# EAGLE board uC_ATMEL (EAGLE 7.1.0)
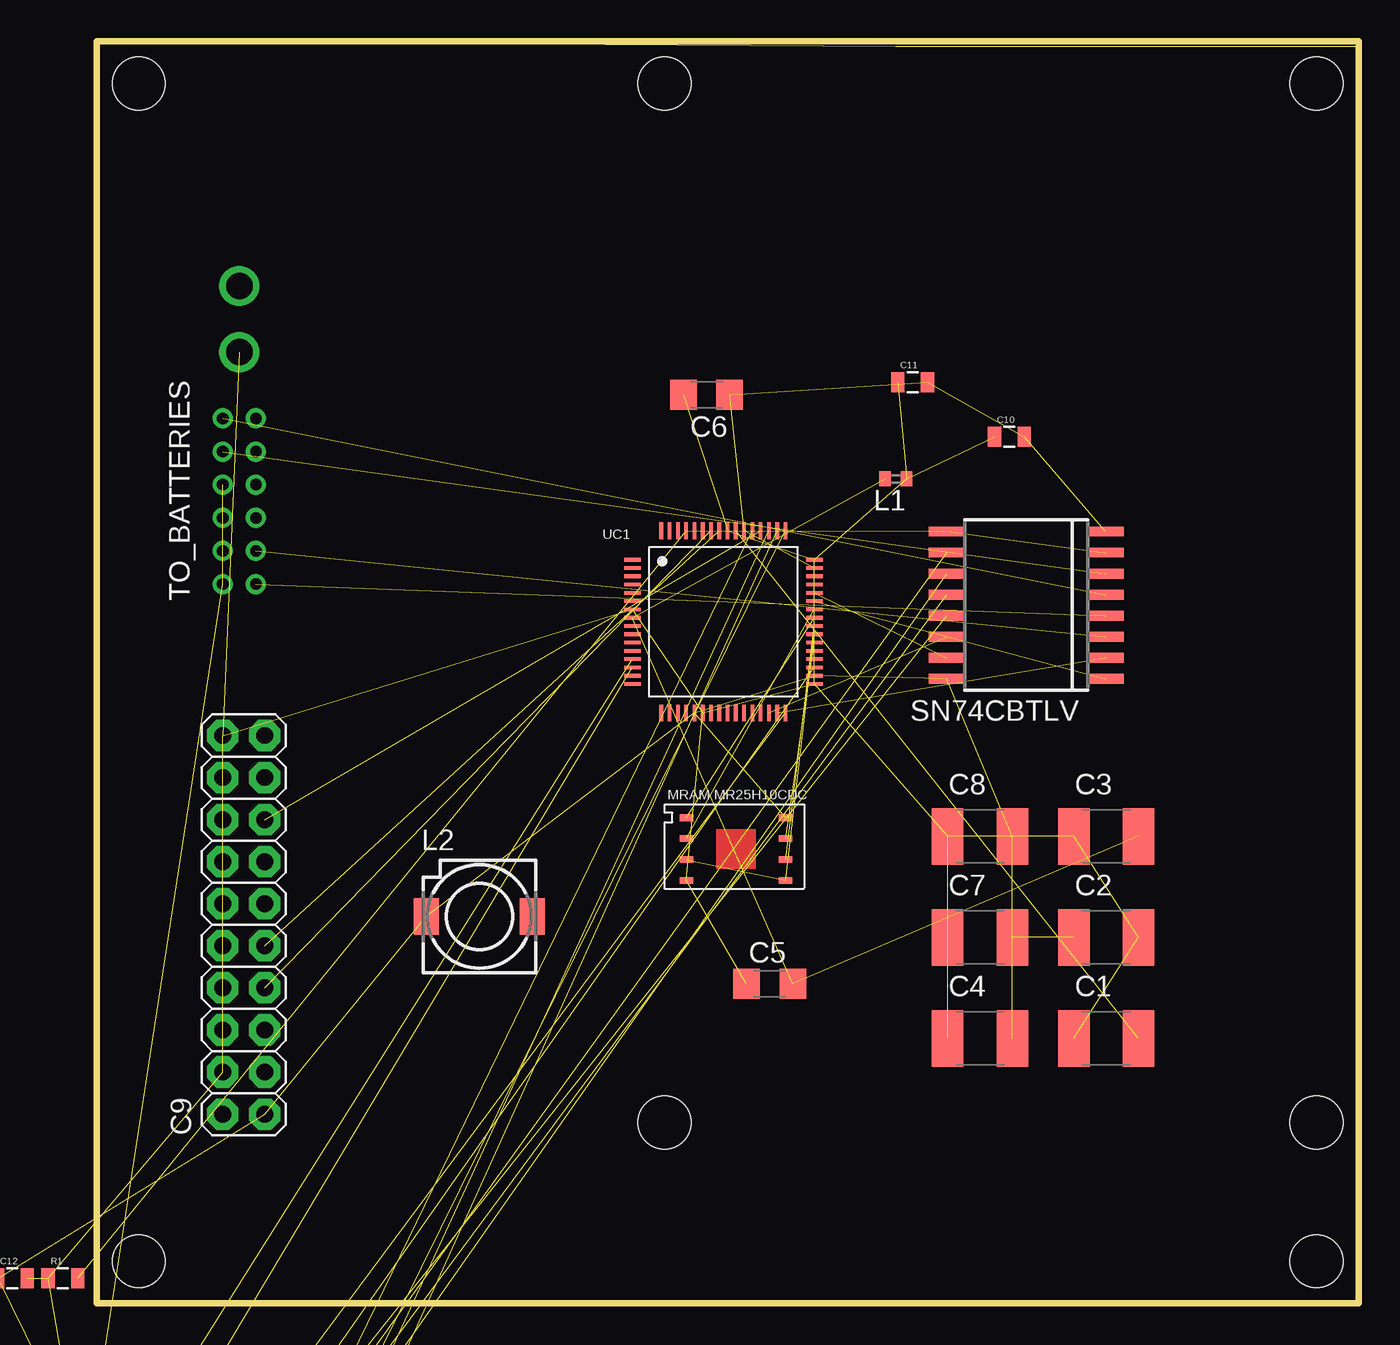
[diagram p0: board, top side]
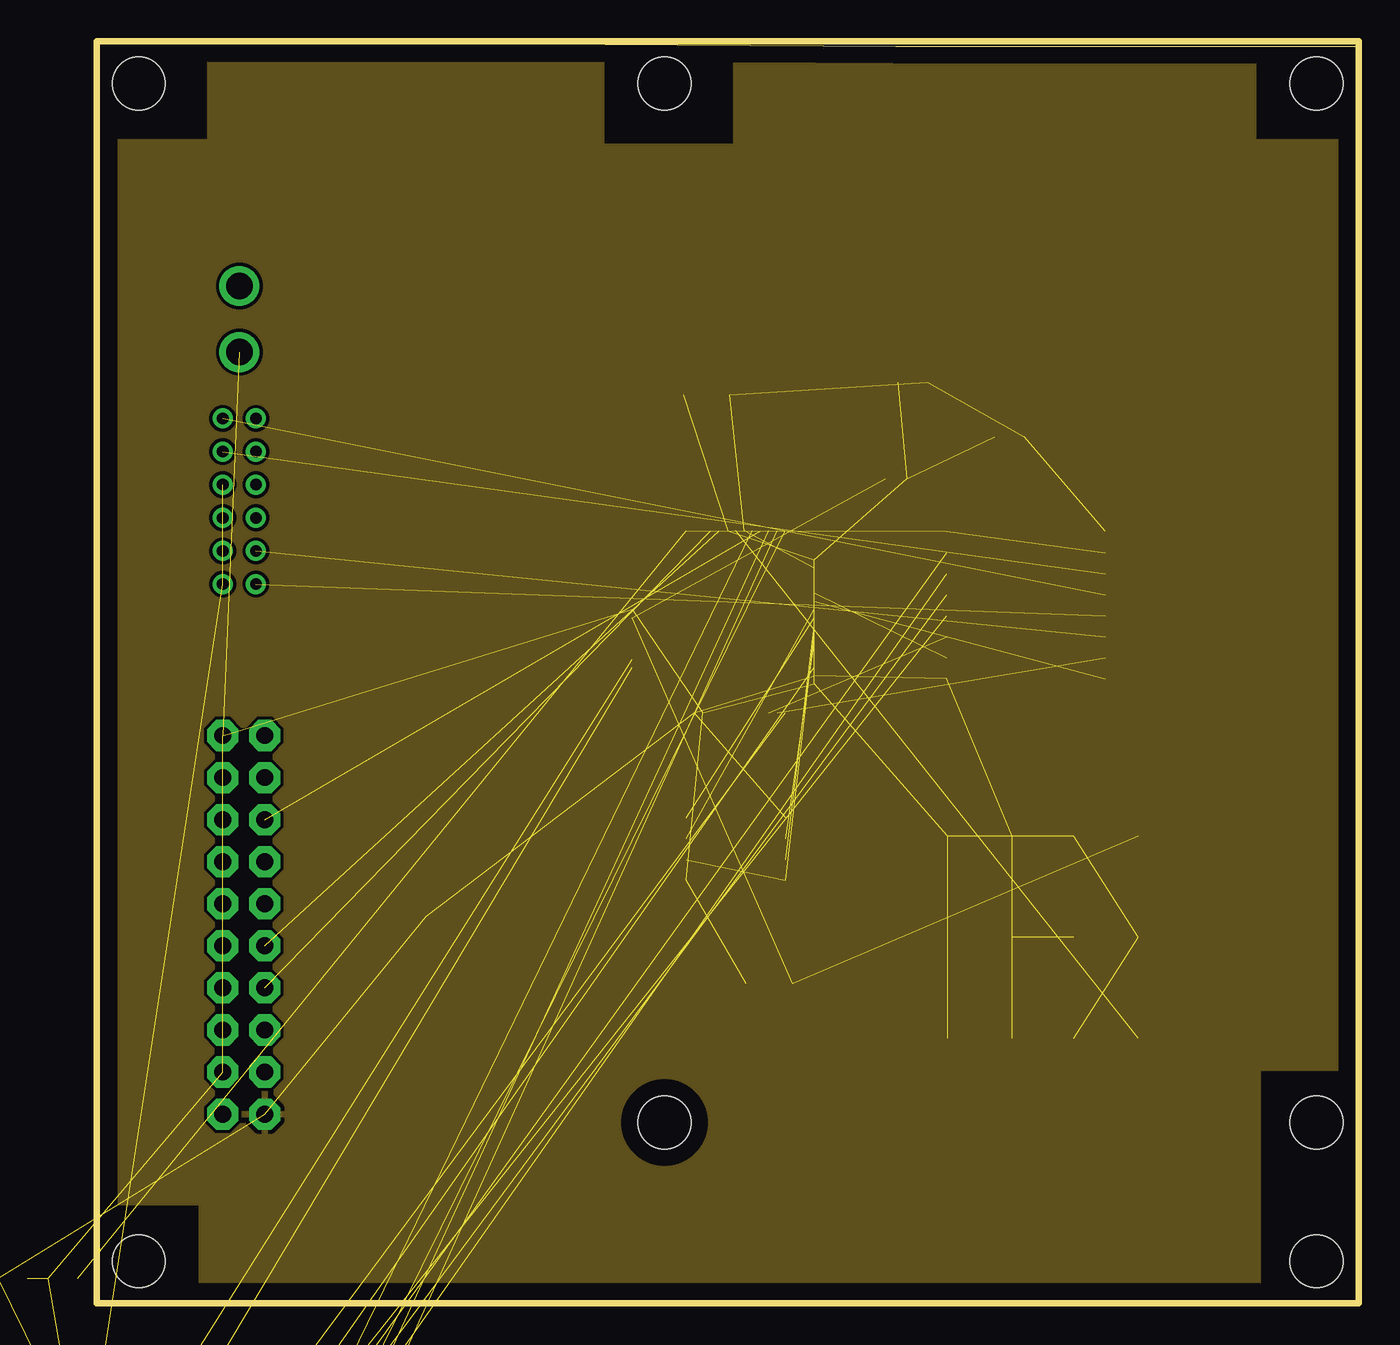
[diagram p1: board, inner layer VDD]
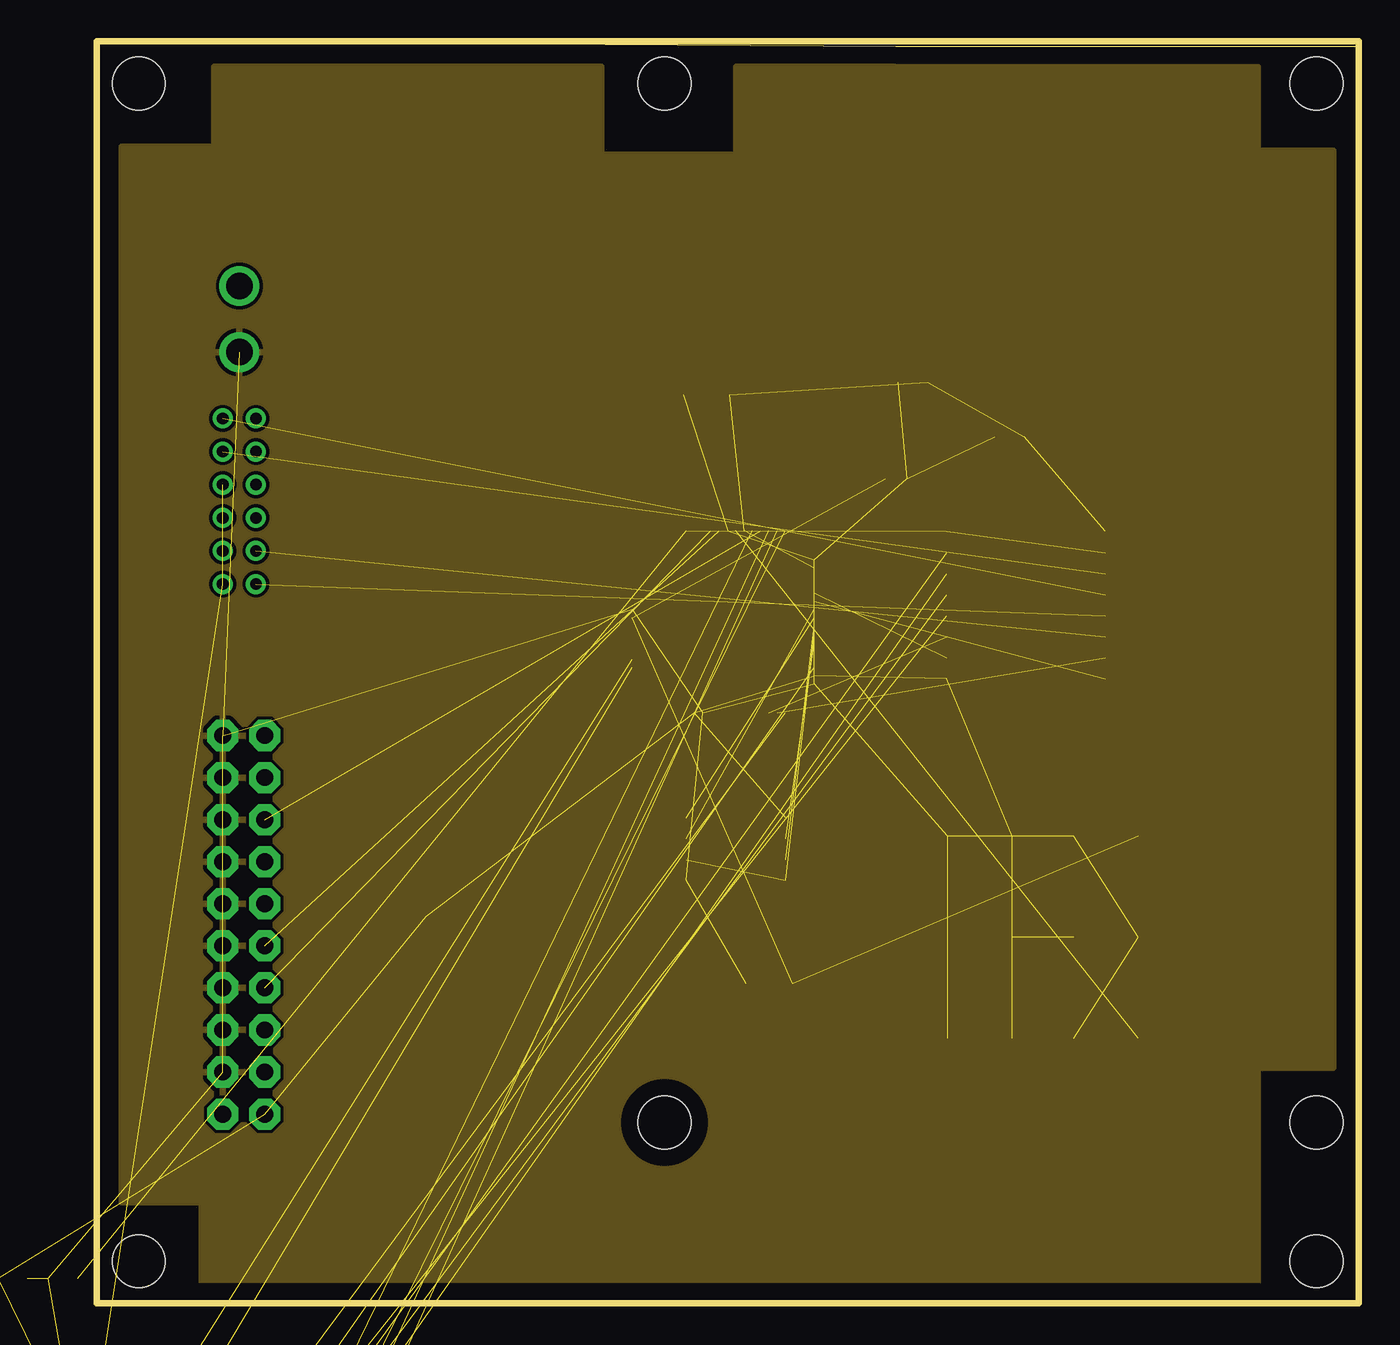
[diagram p2: board, inner layer GND]

Size 76.2 x 76.2 mm. Coordinates in mm from the lower left corner, seen from the top.
Outline: 76.18,75.87 48.26,75.87 0,76.2
Outline: 0,76.2 0,0 76.18,0 76.2,0 76.2,76.2 0,76.2
Copper layers (1*2*3*16): Top 0.035mm / dielectric 1.5mm / VDD 0.035mm / dielectric 0.15mm / GND 0.035mm / dielectric 0.2mm / Bottom 0.035mm
Design rules "default *": minimum track width 10mil, minimum drill 24mil, track to track 8mil, track to pad 8mil, pad to pad 8mil, via to via 8mil, smd to smd 8mil, copper to edge 40mil, drill to drill 8mil, minimum pad ring 10mil, minimum via ring 8mil, stop-mask expansion 4mil, vias tented up to drill 0mil, thermal gap 10mil
Holes 3.17 mm at 2.54,2.54 73.66,2.54 73.66,10.92 73.66,73.66 2.54,73.66 34.29,10.92 34.29,73.66
tKeepout: area -0.3,-0.3 to 5.1,5.1; area 0,71.1 to 5.1,76.2; area 31.8,71.1 to 36.8,76.2; area 71.1,71.1 to 76.2,76.2; area 31.8,8.4 to 36.8,13.5; area 71.1,0 to 76.2,13.5

## Footprints (pad centres in the part's own frame; a part is rotated, then mirrored left to right if it is on the bottom)
C1812 = smd 1.9 x 3.4: 1 -1.95,0; 2 1.95,0
C1206 = smd 1.6 x 1.8: 1 -1.4,0; 2 1.4,0
2X10 = drill 1.016 pad 1.88 octagon: 1 -11.43,-1.27; 2 -11.43,1.27; 3 -8.89,-1.27; 4 -8.89,1.27; 5 -6.35,-1.27; 6 -6.35,1.27; 7 -3.81,-1.27; 8 -3.81,1.27; 9 -1.27,-1.27; 10 -1.27,1.27; 11 1.27,-1.27; 12 1.27,1.27; 13 3.81,-1.27; 14 3.81,1.27; 15 6.35,-1.27; 16 6.35,1.27; 17 8.89,-1.27; 18 8.89,1.27; 19 11.43,-1.27; 20 11.43,1.27
0805 = smd 0.8 x 1.2: 1 -0.9,0; 2 0.9,0
HARWIN_DATAMATE_6 = drill 0.7 square: P$1 -2,1; P$2 0,1; P$3 2,1; P$4 2,-1; P$5 0,-1; P$6 -2,-1 | hole 2.2: -5.5,0; 5.5,0
0402 = smd 0.7 x 0.9: 1 -0.65,0; 2 0.65,0
SLF7045 = smd 1.5 x 2.2: 1 -3.2,0; 2 3.2,0
SOIC16R = smd 0.6 x 2.2: 1 -4.445,-4.775; 2 -3.175,-4.775; 3 -1.905,-4.775; 4 -0.635,-4.775; 5 0.635,-4.775; 6 1.905,-4.775; 7 3.175,-4.775; 8 4.445,-4.775; 9 4.445,4.8; 10 3.175,4.8; 11 1.905,4.8; 12 0.635,4.8; 13 -0.635,4.8; 14 -1.905,4.8; 15 -3.175,4.8; 16 -4.445,4.8
HARWIN_DATAMATE_14 = drill 0.7: P$1 0,0; P$2 2,0; P$3 4,0; P$4 6,0; P$5 8,0; P$6 10,0; P$7 0,-2; P$8 2,-2; P$9 4,-2; P$10 6,-2; P$11 8,-2; P$12 10,-2 | drill 1.6: P$13 14,-1; P$14 18,-1
HARWIN_DATAMATE_12 = drill 0.7 square: P$1 -5,1; P$2 -3,1; P$3 -1,1; P$4 1,1; P$5 3,1; P$6 5,1; P$7 5,-1; P$8 3,-1; P$9 1,-1; P$10 -1,-1; P$11 -3,-1; P$12 -5,-1 | hole 2.8: -8.5,0; 8.5,0
8PXMO-229 = smd 0.813 x 0.406: P1 -3,1.895; P2 -3,0.635; P3 -3,-0.635; P4 -3,-1.895; P5 3,-1.895; P6 3,-0.635; P7 3,0.635; P8 3,1.895
QFN10_POWERPAD = smd 0.203 x 0.406: P$1 0.14,0.241; P$2 0.641,0.241; P$3 1.141,0.242; P$4 1.639,0.239; P$5 2.139,0.242; P$6 2.14,3.559; P$7 1.639,3.559; P$8 1.139,3.555; P$9 0.641,3.555; P$10 0.139,3.558 | smd 1.778 x 0.914: PAD 1.155,1.898
TQFP-64 = smd 1 x 0.22: P$1 -5.5,3.5; P$2 -5.5,3; P$3 -5.5,2.5; P$4 -5.5,2; P$5 -5.5,1.5; P$6 -5.5,1; P$7 -5.5,0.5; P$8 -5.5,0; P$9 -5.5,-0.5; P$10 -5.5,-1; P$11 -5.5,-1.5; P$12 -5.5,-2; P$13 -5.5,-2.5; P$14 -5.5,-3; P$15 -5.5,-3.5; P$16 -5.5,-4; P$33 5.5,-4; P$34 5.5,-3.5; P$35 5.5,-3; P$36 5.5,-2.5; P$37 5.5,-2; P$38 5.5,-1.5; P$39 5.5,-1; P$40 5.5,-0.5; P$41 5.5,0; P$42 5.5,0.5; P$43 5.5,1; P$44 5.5,1.5; P$45 5.5,2; P$46 5.5,2.5; P$47 5.5,3; P$48 5.5,3.5 | smd 0.22 x 1: P$17 -3.75,-5.75; P$18 -3.25,-5.75; P$19 -2.75,-5.75; P$20 -2.25,-5.75; P$21 -1.75,-5.75; P$22 -1.25,-5.75; P$23 -0.75,-5.75; P$24 -0.25,-5.75; P$25 0.25,-5.75; P$26 0.75,-5.75; P$27 1.25,-5.75; P$28 1.75,-5.75; P$29 2.25,-5.75; P$30 2.75,-5.75; P$31 3.25,-5.75; P$32 3.75,-5.75; P$49 3.75,5.25; P$50 3.25,5.25; P$51 2.75,5.25; P$52 2.25,5.25; P$53 1.75,5.25; P$54 1.25,5.25; P$55 0.75,5.25; P$56 0.25,5.25; P$57 -0.25,5.25; P$58 -0.75,5.25; P$59 -1.25,5.25; P$60 -1.75,5.25; P$61 -2.25,5.25; P$62 -2.75,5.25; P$63 -3.25,5.25; P$64 -3.75,5.25

## Placement (x,y rotation side)
C1  0.1u  [C1812]  60.96,16 0 top
C2  0.1u  [C1812]  60.96,22.1 0 top
C3  0.1u  [C1812]  60.96,28.19 0 top
C4  0.1u  [C1812]  53.34,16 0 top
C5  10u  [C1206]  40.64,19.3 0 top
C6  10u  [C1206]  36.83,54.86 180 top
C7  0.1u  [C1812]  53.34,22.1 0 top
C8  0.1u  [C1812]  53.34,28.19 0 top
C9  [2X10]  8.89,22.86 90 top
C10  0.1u  [0805]  55.12,52.32 0 top
C11  0.1u  [0805]  49.28,55.63 0 top
C12  0.1u  [0805]  -5.08,1.52 0 top  (outside the outline)
C13  [0805]  -8.38,-48.77 0 top  (outside the outline)
HEADER1  HARWIN_06  [HARWIN_DATAMATE_6]  0,-28.45 0 top  (outside the outline)
HEADER2  HARWIN_06  [HARWIN_DATAMATE_6]  0,-20.32 0 top  (outside the outline)
HEADER3  HARWIN_06  [HARWIN_DATAMATE_6]  0,-24.38 0 top  (outside the outline)
HEADER4  HARWIN_06  [HARWIN_DATAMATE_6]  0,-36.58 0 top  (outside the outline)
HEADER5  HARWIN_06  [HARWIN_DATAMATE_6]  0,-32.51 0 top  (outside the outline)
L1  BLM15HB121SN1  [0402]  48.26,49.78 180 top
L2  SLF7045  [SLF7045]  23.11,23.37 0 top
R1  1.33k  [0805]  -2.03,1.52 0 top
SN74CBTLV  [SOIC16R]  56.13,42.16 90 top
TO_BATTERIES  [HARWIN_DATAMATE_14]  7.62,43.43 90 top
TO_FLASH  HARWIN_12  [HARWIN_DATAMATE_12]  3.3,-16.26 0 top  (outside the outline)
U1  [SOIC16R]  0.76,-44.7 0 top  (outside the outline)
U$1  [8PXMO-229]  38.61,27.43 0 top
U$2  TPS6300X  [QFN10_POWERPAD]  -5.84,-6.35 0 top  (outside the outline)
U$3  TPS6300X  [QFN10_POWERPAD]  -5.84,-13.21 0 top  (outside the outline)
UC1  SAMD21JTQFP-64  [TQFP-64]  37.85,41.4 0 top

## Library data of the parts
C1-C8 = rcl
C9-C13 HEADER1-HEADER5 R1 SN74CBTLV TO_BATTERIES TO_FLASH U1 U$2 U$3 = CNTRL_BOARD
L1 L2 = inductors
U$1 = mram
UC1 = SAMD21J

## Nets
5V0: TO_BATTERIES.P$1 TO_BATTERIES.P$2 TO_BATTERIES.P$3 TO_BATTERIES.P$4 TO_FLASH.P$12
GND: C1.1 C2.2 C3.1 C4.1 C5.1 C6.1 C7.1 C8.1 C9.4 C9.6 C9.8 C9.10 C9.12 C9.14 C9.16 C9.18 C9.20 C10.2 C11.2 C12.2 R1.1 SN74CBTLV.8 TO_BATTERIES.P$13 TO_FLASH.P$11 U1.8 U$1.P4 UC1.P$7 UC1.P$22 UC1.P$33 UC1.P$47 UC1.P$54
N$1: U$2.P$5 U$2.P$6 U$2.P$7 U$2.P$8
N$2: U$3.P$5 U$3.P$6 U$3.P$7 U$3.P$8
N$3: SN74CBTLV.3 TO_BATTERIES.P$8
N$4: SN74CBTLV.4 TO_BATTERIES.P$7
N$5: SN74CBTLV.5 TO_BATTERIES.P$6
N$6: SN74CBTLV.6 TO_BATTERIES.P$5
N$7: U$3.P$2
N$8: U$2.P$2
N$9: U$2.P$4
N$10: U$3.P$4
N$11: U$2.P$1 U$2.P$10
N$12: SN74CBTLV.13 TO_FLASH.P$5
N$13: SN74CBTLV.12 TO_FLASH.P$6
N$14: SN74CBTLV.11 TO_FLASH.P$7
N$15: SN74CBTLV.10 TO_FLASH.P$8
N$16: U$2.P$9 U$2.PAD
N$17: U$2.P$3
N$18: U$3.P$1 U$3.P$10
N$19: U$3.P$9 U$3.PAD
N$20: U$3.P$3
N$21: HEADER1.P$1 U1.6
N$22: HEADER2.P$1 U1.5
N$23: HEADER3.P$1 U1.4
N$24: HEADER4.P$1 U1.3
N$25: HEADER5.P$1 U1.10
N$26: C13.2
N$27: HEADER4.P$4
N$28: HEADER4.P$5
N$29: HEADER3.P$4
N$30: HEADER3.P$5
N$31: HEADER2.P$4
N$32: HEADER2.P$5
N$33: HEADER1.P$4
N$34: HEADER1.P$5
PA00: UC1.P$1
PA01: UC1.P$2
PA02: UC1.P$3
PA03: UC1.P$4
PA04: HEADER1.P$3 HEADER2.P$3 HEADER3.P$3 HEADER4.P$3 TO_FLASH.P$1 UC1.P$13
PA05: HEADER1.P$2 HEADER2.P$2 HEADER3.P$2 HEADER4.P$2 TO_FLASH.P$2 UC1.P$14
PA06: UC1.P$15
PA07: UC1.P$16
PA08: UC1.P$17
PA09: UC1.P$18
PA10: UC1.P$19
PA11: UC1.P$20
PA12: UC1.P$29
PA13: SN74CBTLV.14 UC1.P$30
PA14: SN74CBTLV.2 UC1.P$31
PA15: TO_FLASH.P$10 UC1.P$32
PA16: TO_FLASH.P$9 UC1.P$35
PA17: UC1.P$36
PA18: UC1.P$37
PA19: U$1.P7 UC1.P$38
PA20: U$1.P1 UC1.P$41
PA21: U$1.P2 UC1.P$42
PA22: SN74CBTLV.1 UC1.P$43
PA23: SN74CBTLV.15 UC1.P$44
PA24: UC1.P$45
PA25: UC1.P$46
PA27: U1.1 UC1.P$51
PA28: U1.15 UC1.P$53
PA30: C9.9 UC1.P$57
PA31: C9.7 UC1.P$58
PB00: R1.2 SN74CBTLV.7 SN74CBTLV.9 UC1.P$61
PB01: UC1.P$62
PB02: UC1.P$63
PB03: UC1.P$64
PB04: UC1.P$5
PB05: UC1.P$6
PB06: UC1.P$9
PB07: UC1.P$10
PB08: UC1.P$11
PB09: UC1.P$12
PB10: UC1.P$23
PB11: UC1.P$24
PB12: UC1.P$25
PB13: UC1.P$26
PB14: UC1.P$27
PB15: UC1.P$28
PB16: U$1.P3 U$1.P5 UC1.P$39
PB17: U$1.P6 UC1.P$40
PB22: U1.14 UC1.P$49
PB23: U1.2 UC1.P$50
PB30: UC1.P$59
PB31: UC1.P$60
PHOTODIODE_FLASH: TO_FLASH.P$4
PRIMARY: TO_BATTERIES.P$14
PWROUT_S1: HEADER1.P$6
PWROUT_S2: HEADER2.P$6
PWROUT_S3: HEADER3.P$6
PWROUT_S4: HEADER4.P$6
RESETN: C9.15 UC1.P$52
V_SECONDARY_1: TO_BATTERIES.P$9
V_SECONDARY_2: TO_BATTERIES.P$10
V_SECONDARY_3: TO_BATTERIES.P$11
V_SECONDARY_4: TO_BATTERIES.P$12
VDD: C2.1 C4.2 C6.2 C7.2 C8.2 C9.1 C10.1 C11.1 C12.1 C13.1 L1.1 L2.1 SN74CBTLV.16 TO_FLASH.P$3 U1.16 U$1.P8 UC1.P$21 UC1.P$34 UC1.P$48 UC1.P$56
VDDANA: C3.2 C5.2 L1.2 UC1.P$8
VDDCORE: C1.2 UC1.P$55

## Tracks (layer width: path | path; a pad name or v marks a point on that pad's centre or on a via)
5V0  (4 unrouted)
GND  (30 unrouted)
  pour GND: 1.52,69.85 7.11,69.85 7.11,74.68 30.48,74.68 30.48,69.34 38.61,69.34 38.61,74.68 70.1,74.68 70.1,69.6 74.68,69.6 74.68,14.22 70.1,14.22 70.1,1.27 6.35,1.27 6.35,6.1 1.52,6.1
N$1  (3 unrouted)
N$2  (3 unrouted)
N$3  (1 unrouted)
N$4  (1 unrouted)
N$5  (1 unrouted)
N$6  (1 unrouted)
N$11  (1 unrouted)
N$12  (1 unrouted)
N$13  (1 unrouted)
N$14  (1 unrouted)
N$15  (1 unrouted)
N$16  (1 unrouted)
N$18  (1 unrouted)
N$19  (1 unrouted)
N$21  (1 unrouted)
N$22  (1 unrouted)
N$23  (1 unrouted)
N$24  (1 unrouted)
N$25  (1 unrouted)
PA04  (5 unrouted)
PA05  (5 unrouted)
PA13  (1 unrouted)
PA14  (1 unrouted)
PA15  (1 unrouted)
PA16  (1 unrouted)
PA19  (1 unrouted)
PA20  (1 unrouted)
PA21  (1 unrouted)
PA22  (1 unrouted)
PA23  (1 unrouted)
PA27  (1 unrouted)
PA28  (1 unrouted)
PA30  (1 unrouted)
PA31  (1 unrouted)
PB00  (3 unrouted)
PB16  (2 unrouted)
PB17  (1 unrouted)
PB22  (1 unrouted)
PB23  (1 unrouted)
RESETN  (1 unrouted)
VDD  (19 unrouted)
  pour VDD: 1.27,70.1 6.86,70.1 6.86,75.18 30.48,75.18 30.48,69.85 38.61,69.85 38.61,74.93 69.85,74.93 69.85,70.1 74.93,70.1 74.93,14.22 70.1,14.22 70.1,1.27 6.35,1.27 6.35,6.1 1.27,6.1
VDDANA  (3 unrouted)
VDDCORE  (1 unrouted)